# EAGLE board Opto-coupler_SMD-OM-v2 (EAGLE 8.3.1)
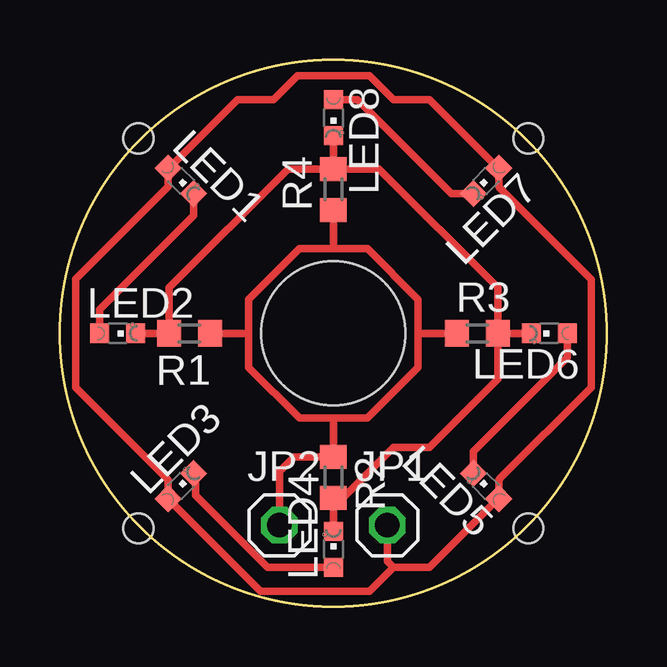
[diagram p0: board, top side]

Size 22.8 x 22.8 mm. Coordinates in mm from the lower left corner, seen from the top.
Outline: circle at 11.4,11.4 radius 11.4
Copper layers (1*16): Top 0.035mm / dielectric 1.5mm / Bottom 0.035mm
Design rules "OthermillDRC_1_64_v2": minimum track width 16mil, minimum drill 31mil, track to track 0.39878125mm, track to pad 0.39878125mm, pad to pad 0.39878125mm, via to via 0.39878125mm, smd to smd 0mil, copper to edge 0mil, drill to drill 1mil, minimum pad ring 0mil, minimum via ring 15mil, stop-mask expansion 1mil, vias tented up to drill 30mil, thermal gap 10mil
Holes 6 mm at 11.4,11.4
Holes 1.25 mm at 19.53,19.53 3.27,3.27 3.27,19.53 19.53,3.27

## Footprints (pad centres in the part's own frame; a part is rotated, then mirrored left to right if it is on the bottom)
1X01 = drill 1.016 octagon: 1 0,0
CHIPLED_0603 = smd 0.8 x 0.8: A 0,-0.75; C 0,0.75
R0603 = smd 1 x 1.1: 1 -0.85,0; 2 0.85,0

## Placement (x,y rotation side)
JP1  [1X01]  13.65,3.4 0 top
JP2  [1X01]  9.15,3.4 0 top
LED1  [CHIPLED_0603]  5.04,17.76 225 top
LED2  [CHIPLED_0603]  2.4,11.4 270 top
LED3  [CHIPLED_0603]  5.04,5.04 315 top
LED4  [CHIPLED_0603]  11.4,2.4 0 top
LED5  [CHIPLED_0603]  17.76,5.04 45 top
LED6  [CHIPLED_0603]  20.4,11.4 90 top
LED7  [CHIPLED_0603]  17.76,17.76 135 top
LED8  [CHIPLED_0603]  11.4,20.4 180 top
R1  100  [R0603]  5.4,11.4 180 top
R2  100  [R0603]  11.4,5.4 270 top
R3  100  [R0603]  17.4,11.4 0 top
R4  100  [R0603]  11.4,17.4 90 top

## Library data of the parts
JP1 JP2 = pinhead
LED1-LED8 R1-R4 = adafruit

## Nets
GND: JP2.1 R1.1 R2.1 R3.1 R4.1
N$2: LED1.C LED2.A
N$3: LED2.C LED4.C LED6.C LED8.C R1.2 R2.2 R3.2 R4.2
N$4: LED3.C LED4.A
N$6: LED5.C LED6.A
N$7: LED7.C LED8.A
VCC: JP1.1 LED1.A LED3.A LED5.A LED7.A

## Tracks (layer width: path | path; a pad name or v marks a point on that pad's centre or on a via)
GND
  Top 0.305: 11.51,14.94 9.99,14.94 7.86,12.81 7.86,11.47 | 11.51,14.94 12.81,14.94 14.94,12.81 14.94,11.39 | 14.94,11.39 14.94,9.99 12.81,7.86 11.46,7.86 | 11.46,7.86 9.99,7.86 7.86,9.99 7.86,11.47 | R1.1 7.8,11.4 7.86,11.47 | 11.46,7.86 11.4,7.81 R2.1 9.75,6.25 9.15,5.65 JP2.1 | R3.1 14.94,11.4 14.94,11.39 | R4.1 11.4,15.05 11.51,14.94
N$2
  Top 0.305: LED1.C 5.57,16.32 1.65,12.4 LED2.A
N$3
  Top 0.305: LED6.C R3.2 | LED4.C R2.2 11.8,4.55 13.9,6.65 15.4,6.65 18.25,9.5 R3.2 | LED2.C R1.2 4.55,13.3 9.5,18.25 R4.2 | LED8.C R4.2 | R4.2 13.3,18.25 18.25,13.3 R3.2
N$4
  Top 0.305: LED4.A 8.65,1.65 5.65,4.65 5.65,5.48 LED3.C
N$6
  Top 0.305: LED5.C 17.23,6.48 21.15,10.4 LED6.A
N$7
  Top 0.305: LED7.C 16.32,17.23 12.4,21.15 LED8.A
VCC
  Top 0.305: 13.9,1.65 15.4,1.65 18.26,4.51 LED5.A 18.29,5.28 18.35,5.34 18.35,5.35 22.15,9.15 22.15,13.65 18.35,17.45 18.35,17.46 18.29,17.52 LED7.A 18.26,18.29 15.4,21.15 13.9,21.15 12.9,22.15 9.9,22.15 8.9,21.15 7.4,21.15 4.54,18.29 LED1.A 4.51,17.52 0.65,13.66 0.65,9.14 4.51,5.28 LED3.A 8.36,0.65 12.9,0.65 13.9,1.65 | JP1.1 13.65,1.9 13.9,1.65